# EAGLE board PCB_v78 (EAGLE 9.7.0)
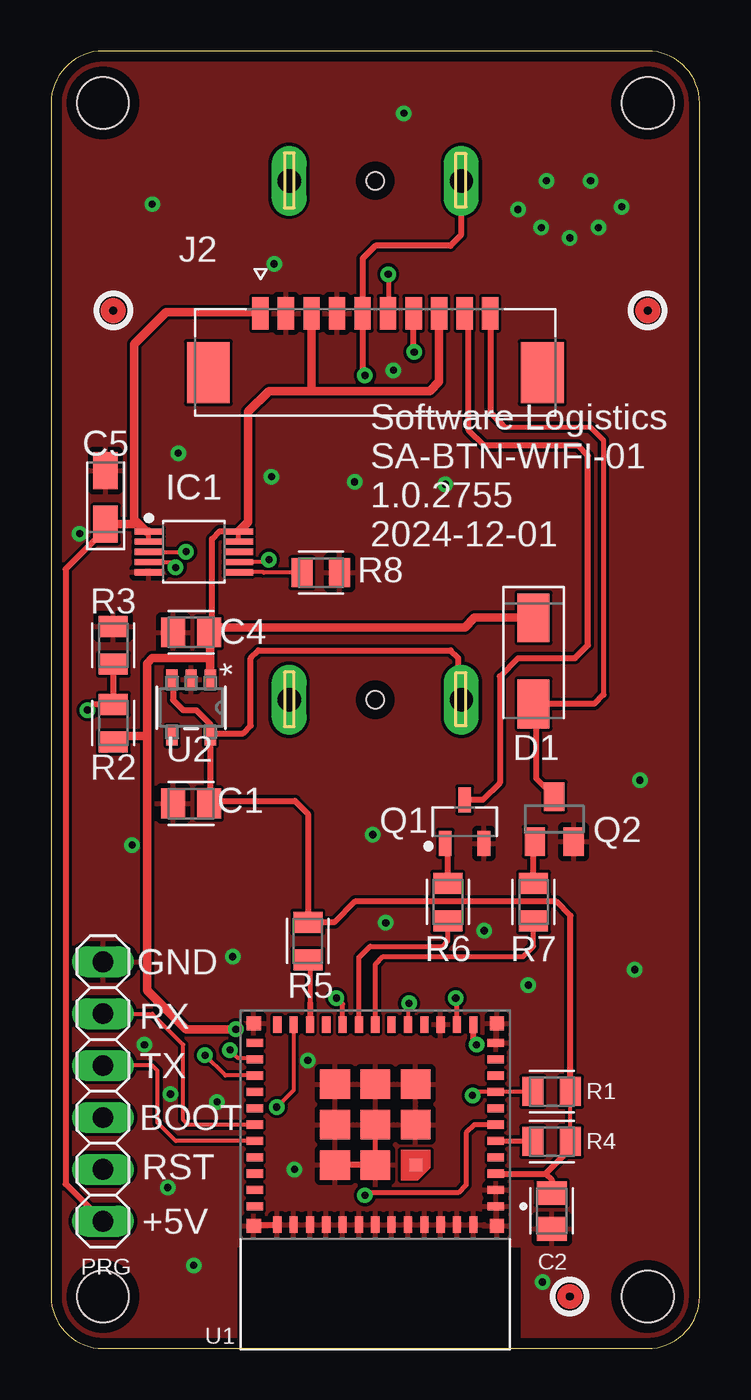
[diagram p0: board, top side]
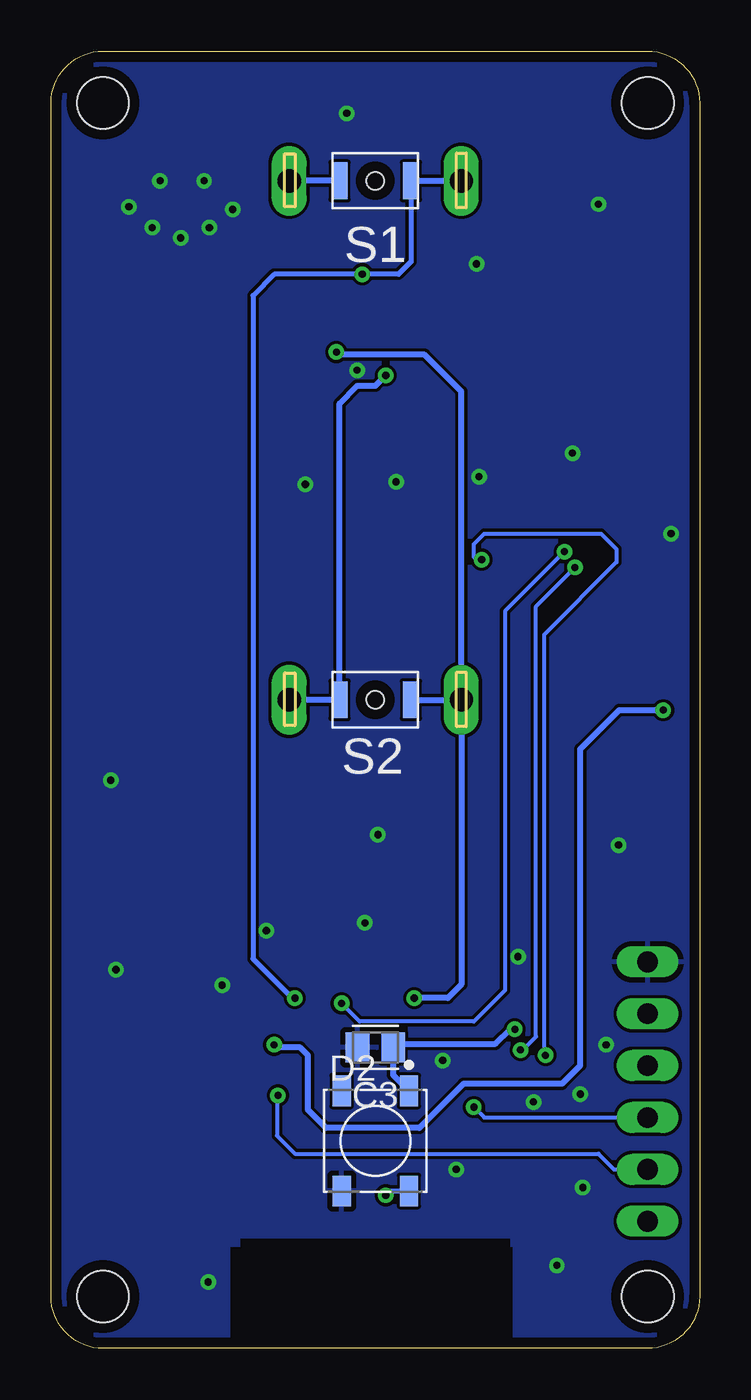
[diagram p1: board, bottom side, seen from below]

Size 31.75 x 63.5 mm. Coordinates in mm from the lower left corner, seen from the top.
Outline: 0,60.96 0,2.54 arc90 2.54,0 29.21,0 arc90 31.75,2.54 31.75,60.96 arc90 29.21,63.5 2.54,63.5 arc90 0,60.96
Copper layers (1*16): Top 0.035mm / dielectric 1.5mm / Bottom 0.035mm
Design rules "Fusion Electronics Design Rules": minimum track width 6mil, minimum drill 0.35mm, track to track 6mil, track to pad 6mil, pad to pad 6mil, via to via 6mil, smd to smd 6mil, copper to edge 20mil, drill to drill 4mil, minimum pad ring 10mil, minimum via ring 8mil, stop-mask expansion 4mil, vias tented up to drill 0mil, thermal gap 10mil
Holes 2.54 mm at 29.21,60.96 2.54,60.96 2.54,2.54 29.21,2.54

## Footprints (pad centres in the part's own frame; a part is rotated, then mirrored left to right if it is on the bottom)
CAPC2012X110 = smd 1.165 x 1.465: 1 -0.875,0; 2 0.875,0
CAPMP3216X180N = smd 1.796 x 1.189: 1 -1.31,0; 2 1.31,0
DIOM5226X290N = smd 2.392 x 1.565: 1 -2.108,0; 2 2.108,0
WS2812B = smd 1.5 x 0.9: 1 -2.45,1.65; 2 -2.45,-1.65; 3 2.45,-1.65; 4 2.45,1.65
SOP50P490X110-10 = smd 1.4 x 0.3: 1 -2.2,1; 2 -2.2,0.5; 3 -2.2,0; 4 -2.2,-0.5; 5 -2.2,-1; 6 2.2,-1; 7 2.2,-0.5; 8 2.2,0; 9 2.2,0.5; 10 2.2,1
MOLEX_532611071 = smd 0.8 x 1.6: 1 -5.625,2.4; 2 -4.375,2.4; 3 -3.125,2.4; 4 -1.875,2.4; 5 -0.625,2.4; 6 0.625,2.4; 7 1.875,2.4; 8 3.125,2.4; 9 4.375,2.4; 10 5.625,2.4 | smd 2.1 x 3: S1 -8.175,-0.5; S2 8.175,-0.5
1X06 = drill 1.016 long: 1 -6.35,0; 2 -3.81,0; 3 -1.27,0; 4 1.27,0; 5 3.81,0; 6 6.35,0
SOT95P237X112-3N = smd 1.224 x 0.625: 1 -1.064,0.95; 2 -1.064,-0.95; 3 1.064,0
SOT23 = smd 1 x 1.4: 1 -0.95,-1.1; 2 0.95,-1.1; 3 0,1.1
RESC2012X65 = smd 1.031 x 1.42: 1 -0.919,0; 2 0.919,0
B3U-1000P(M)-B = smd 0.8 x 1.8: 1 -1.75,0; 2 1.75,0 | hole 0.85: 0,0
XCVR_ESP32-C3-MINI-1-N4 = smd 0.8 x 0.4: 1 -5.9,1.3; 2 -5.9,0.5; 3 -5.9,-0.3; 4 -5.9,-1.1; 5 -5.9,-1.9; 6 -5.9,-2.7; 7 -5.9,-3.5; 8 -5.9,-4.3; 9 -5.9,-5.1; 10 -5.9,-5.9; 11 -5.9,-6.7; 25 5.9,-6.7; 26 5.9,-5.9; 27 5.9,-5.1; 28 5.9,-4.3; 29 5.9,-3.5; 30 5.9,-2.7; 31 5.9,-1.9; 32 5.9,-1.1; 33 5.9,-0.3; 34 5.9,0.5; 35 5.9,1.3 | smd 0.4 x 0.8: 12 -4.8,-7.6; 13 -4,-7.6; 14 -3.2,-7.6; 15 -2.4,-7.6; 16 -1.6,-7.6; 17 -0.8,-7.6; 18 0,-7.6; 19 0.8,-7.6; 20 1.6,-7.6; 21 2.4,-7.6; 22 3.2,-7.6; 23 4,-7.6; 24 4.8,-7.6; 36 4.8,2.2; 37 4,2.2; 38 3.2,2.2; 39 2.4,2.2; 40 1.6,2.2; 41 0.8,2.2; 42 0,2.2; 43 -0.8,2.2; 44 -1.6,2.2; 45 -2.4,2.2; 46 -3.2,2.2; 47 -4,2.2; 48 -4.8,2.2 | smd 0.6 x 0.6: 49_1 -1.975,-0.725 | smd 1.45 x 1.45: 49_2 0,-0.725; 49_3 1.975,-0.725; 49_4 1.975,-2.7; 49_5 1.975,-4.675; 49_6 0,-4.675; 49_7 -1.975,-4.675; 49_8 -1.975,-2.7; 49_9 0,-2.7 | smd 0.7 x 0.7: 50 5.95,2.25; 51 5.95,-7.65; 52 -5.95,-7.65; 53 -5.95,2.25
TSOT-23-5_RIT = smd 0.953 x 0.559: 1 -1.378,0.94; 2 -1.378,0; 3 -1.378,-0.94; 4 1.378,-0.94; 5 1.378,0.94
2-POS-NO-SWITCH = drill 1.143 long: P$1 -4.216,0; P$2 4.216,0

## Placement (x,y rotation side)
C1  2.2UF  [CAPC2012X110]  6.86,26.67 180 top
C2  0.1  [CAPC2012X110]  24.51,6.73 270 top
C3  0.1  [CAPC2012X110]  15.88,14.73 180 bottom
C4  2.2UF  [CAPC2012X110]  6.86,35.05 180 top
C5  [CAPMP3216X180N]  2.67,41.66 90 top
D1  US1G-E3/61T  [DIOM5226X290N]  23.62,33.66 270 top
D2  WS2812B  [WS2812B]  15.88,10.16 270 bottom
F1  FIDUCIAL  [FIDUCIAL]  3.05,50.8 0 top
F2  FIDUCIAL  [FIDUCIAL]  29.21,50.8 0 top
F3  FIDUCIAL  [FIDUCIAL]  25.4,2.54 0 top
IC1  MCP73833-AMI/UN  [SOP50P490X110-10]  6.99,38.99 0 top
J2  JST-1.25-MALE  [MOLEX_532611071]  15.88,48.26 0 top
PRG  PINHD-1X06_1X06M  [1X06]  2.54,12.57 270 top
Q1  NPN  [SOT95P237X112-3N]  20.25,25.78 90 top
Q2  NMOSFET  [SOT23]  24.64,25.91 0 top
R1  10K  [RESC2012X65]  24.51,12.57 0 top
R2  10K  [RESC2012X65]  3.05,30.61 270 top
R3  10K  [RESC2012X65]  3.05,34.42 270 top
R4  10K  [RESC2012X65]  24.51,10.13 0 top
R5  10K  [RESC2012X65]  12.57,19.94 90 top
R6  100  [RESC2012X65]  19.43,21.84 270 top
R7  100  [RESC2012X65]  23.62,21.84 270 top
R8  10K  [RESC2012X65]  13.21,37.97 180 top
S1  B3U-1000P(M)-B  [B3U-1000P(M)-B]  15.88,57.15 180 bottom
S2  B3U-1000P(M)-B  [B3U-1000P(M)-B]  15.88,31.75 0 bottom
U1  ESP32-C3-MINI-1-N4  [XCVR_ESP32-C3-MINI-1-N4]  15.88,8.26 180 top
U2  RT9080-33GJ5TSOT-23-5_RIT  [TSOT-23-5_RIT]  6.86,31.37 270 top
U$1  PUSHBUTTON  [2-POS-NO-SWITCH]  15.88,57.15 0 top
U$2  PUSHBUTTON  [2-POS-NO-SWITCH]  15.88,31.75 0 top

## Library data of the parts
C1-C5 = Capacitor; CATEGORY: Capacitor
D1 = Diode; CATEGORY: Diode; DESCRIPTION: DIODE GEN PURP 400V 1A DO214AC; MANUFACTURER: Vishay Semiconductor Diodes Division; SUB-CATEGORY: Rectifier
D2 = LED; CATEGORY: LED; COLOR: RGB; DESCRIPTION: LED integrated light source; MANUFACTURER: Worldsemi; MPN: WS2812B; OPERATING_TEMP: -25 ℃ to +80℃(TJ); PART_STATUS: Active; SUB_CATEGORY: RGB
F1-F3 U$1 U$2 = MiscParts
IC1 = IC_Power-Management; CATEGORY: IC_Power-Management; COST: 0.97; DESCRIPTION: Charger IC Lithium Ion/Polymer 10-MSOP; DIGIKEY: https://www.digikey.com/en/products/detail/microchip-technology/MCP73833-AMI-UN/1223157?s=N4IgTCBcDaILIGEAKB2AzADjWgtAQTgEkB6AVQDkQBdAXyA; MANUFACTURER: Microchip Technology; MPN: MCP73833-AMI/UN; OPERATING_TEMP: -40°C to 125°C; PART_STATUS: Active; ROHS_COMPLIANT: COMPLIANT; SERIES: -; SUB-CATEGORY: Battery Charger
J2 = JST-1.25-MALE; COST: 0.65; DIGIKEY: https://www.digikey.com/en/products/detail/molex/0532611071/699102; MANUFACTURER: Molex; MAXIMUM_PACKAGE_HEIGHT: 3.4 mm; PARTREV: J; STANDARD: Manufacturer Recommendations
PRG = Tinkercad
Q1 = Transistor; CATEGORY: Transistor; SUB-CATEGORY: BJT; TYPE: NPN
Q2 = Transistor; CATEGORY: Transistor; SUB-CATEGORY: MOSFET; TYPE: N-Channel
R1-R8 = Tutorial - Fusion 360; CATEGORY: Resistor; SUB-CATEGORY: Fixed
S1 = Switch; CATEGORY: SWITCH; COST: 0.76; DESCRIPTION: Ultra-small Surface-mounting Tactile Switches with High Contact Reliability; DIGIKEY: https://www.digikey.com/en/products/detail/omron-electronics-inc-emc-div/B3U-1000P/1534338; MANUFACTURER: OMRON; OPERATING_TEMPERATURE: -25°C to +70°C at 60%RH max; PART_STATUS: ACTIVE; SERIES: B3U; TYPE: Tactile
S2 = Switch; CATEGORY: SWITCH; DESCRIPTION: Ultra-small Surface-mounting Tactile Switches with High Contact Reliability; MANUFACTURER: OMRON; OPERATING_TEMPERATURE: -25°C to +70°C at 60%RH max; PART_STATUS: ACTIVE; SERIES: B3U; TYPE: Tactile
U1 = ESP32-C3-MINI-1-N4; MANUFACTURER: Espressif Systems; MAXIMUM_PACKAGE_HEIGHT: 2.55mm; PARTREV: v1.0; STANDARD: Manufacturer Recommendations
U2 = RT9080-33GJ5; COPYRIGHT: Copyright (C) 2024 Ultra Librarian. All rights reserved.; MANUFACTURER_PART_NUMBER: RT9080-33GJ5; MFR_NAME: Richtek Technology; SLPART: icreglin33v600matsot235

## Nets
+3.3V: C1.1 C2.1 J2.5 R1.2 R4.2 R5.2 S1.2 S2.1 U1.3 U2.3 U2.5 U$1.P$2 U$2.P$2
+5V: C5.1 IC1.1 IC1.2 J2.1 PRG.6
BATT_LVL: R2.1 R3.2 U1.12
BOOT: PRG.4 U1.23
CHRG_PG: IC1.7 U1.27
CHRG_ST1: IC1.3 U1.16
CHRG_ST2: IC1.4 U1.26
EN: PRG.5 R1.1 U1.8
GND: C1.2 C2.2 C3.2 C4.2 C5.2 D2.3 IC1.5 J2.2 J2.4 PRG.1 Q1.2 Q2.2 R3.1 R8.1 U1.1 U1.2 U1.11 U1.14 U1.36 U1.37 U1.38 U1.39 U1.40 U1.41 U1.42 U1.43 U1.44 U1.45 U1.46 U1.47 U1.48 U1.49_1 U1.49_2 U1.49_3 U1.49_4 U1.49_5 U1.49_6 U1.49_7 U1.49_8 U1.49_9 U1.50 U1.51 U1.52 U1.53 U2.2
LED_DIN: D2.4 U1.6
LIPO_PROG: IC1.6 R8.2
N$3: Q2.1 R7.1
N$4: Q1.1 R6.1
PIEZO: R6.2 U1.19
PIEZO_OUT: J2.9 Q1.3
PRG_RX: PRG.2 U1.30
PRG_TX: PRG.3 U1.31
STRAPPING1: R4.1 U1.5
STRAPPING2: R5.1 U1.22
SW1: J2.6 S1.1 U1.13 U$1.P$1
SW2: J2.7 S2.2 U1.20 U$2.P$1
VBATT: C3.1 C4.1 D1.1 D2.1 IC1.9 IC1.10 J2.3 J2.8 R2.2 U2.1
VIBR: R7.2 U1.18
VIBR_MOTOR: D1.2 J2.10 Q2.3

## Tracks (layer width: path | path; a pad name or v marks a point on that pad's centre or on a via)
+3.3V  (via drill 0.35)
  Top 0.203: R4.2 R1.2
  Top 0.305: U2.5 7.8,26.73 | 7.8,26.73 C1.1 | 7.8,26.73 7.86,26.8 11.94,26.8 12.57,26.16 R5.2 13.87,20.86 14.89,21.87 24.74,21.87 25.43,21.18 R1.2 | U2.3 5.97,32.7 5.97,31.75 6.48,31.24 7.11,31.24 7.8,30.56 U2.5 | U2.5 7.91,30.1 9.4,30.1 9.78,30.48 9.78,33.78 10.16,34.16 19.56,34.16 19.94,33.78 19.94,31.9 U$2.P$2 | U1.3 24.21,8.55 | 24.21,8.55 24.51,8.26 C2.1 | R4.2 25.43,9.77 24.21,8.55 | U$1.P$2 20.07,57.25 20.07,54.48 19.56,53.98 15.88,53.98 15.25,53.35 J2.5 15.25,47.74 v15.37,47.62
  Bottom 0.305: S1.2 U$1.P$2 | v15.37,47.62 15.88,47.12 16.76,47.12 17.62,46.26 S2.1 U$2.P$2
+5V
  Top 0.254: IC1.2 IC1.1
  Top 0.305: PRG.6 0.71,8.05 0.71,38.14 2.92,40.35
  Top 0.406: 4.06,40.47 4.06,49.15 5.64,50.72 10.19,50.72 J2.1 | 4.06,40.47 4.06,40.35 2.92,40.35 C5.1 | 4.06,40.47 4.17,40.47 4.66,39.99 IC1.1
BATT_LVL  (via drill 0.35)
  Top 0.305: R3.2 R2.1 2.06,31.53 v1.78,31.24 | v20.83,14.86 20.68,15.01 U1.12
  Bottom 0.305: v1.78,31.24 3.94,31.24 5.84,29.34 5.84,13.84 6.73,12.95 11.56,12.95 13.72,10.79 18.29,10.79 19.18,11.68 19.18,14.35 19.56,14.73 20.57,14.73 20.7,14.86 v20.83,14.86
BOOT  (via drill 0.35)
  Top 0.203: U1.23 11.88,12.64 v11.05,11.81
  Bottom 0.203: v11.05,11.81 10.54,11.3 PRG.4
CHRG_PG  (via drill 0.35)
  Top 0.203: v10.67,38.61 10.55,38.49 IC1.7 | U1.27 8.54,13.36 v7.54,14.35
  Bottom 0.203: v10.67,38.61 10.79,38.48 11.05,38.73 11.05,39.37 10.54,39.88 4.83,39.88 4.06,39.12 4.06,38.48 7.62,34.92 7.62,14.43 v7.54,14.35
CHRG_ST1  (via drill 0.35)
  Top 0.203: IC1.3 6.6,38.99 v6.61,39 | v17.53,16.89 17.48,16.84 U1.16
  Bottom 0.203: v17.53,16.89 16.64,16 11.05,16 9.52,17.53 9.52,36.09 v6.61,39
CHRG_ST2  (via drill 0.35)
  Top 0.203: U1.26 9.91,14.22 9.14,14.22 v8.76,14.61 | IC1.4 5.83,38.49 v6.1,38.23
  Bottom 0.203: v6.1,38.23 8,36.32 8,15.26 8.66,14.61 v8.76,14.61
EN  (via drill 0.35)
  Top 0.203: v20.64,12.38 20.83,12.57 21.76,12.57 U1.8 23.57,12.55 R1.1
  Bottom 0.203: PRG.5 4.19,8.76 4.95,9.53 19.81,9.53 20.69,10.41 20.69,12.33 v20.64,12.38
GND  (via drill 0.35)
  Top 0.254: U1.49_2 15.88,9.02 U1.49_9
  Top 0.305: U1.49_3 13.94,9.02 15.88,9.02 | U1.50 9.97,6.05 U1.36
  other vias: 11.92,8.76 6.22,43.81 10.79,42.67 14.86,42.42 19.3,42.29 10.92,53.09 16.76,47.88 1.39,39.88 15.75,25.15 16.38,20.83 21.21,20.45 23.37,17.78 6.99,4.06 5.71,7.87 28.57,18.54 28.83,27.81 8.89,19.18 5.84,12.45 4.57,14.86 17.27,60.45 4.95,56.01 24.26,57.15 26.42,57.15 22.86,55.75 24,54.86 25.4,54.36 26.8,54.86 27.94,55.88 24.06,3.25 3.97,24.64 12.57,14.1 8.13,12.06
  pour Top: 9.1,5.02 9.13,5.03 23,5.03 23.03,5.02 23.05,5 23.06,4.97 23.06,0.08 31.93,0.08 31.93,63.8 0.08,63.8 0.08,0.08 9.07,0.08 9.07,4.97 9.08,5
  pour Bottom: 9.07,5.06 9.12,5.08 23.01,5.08 23.06,5.06 23.09,5.02 23.11,4.98 23.11,0.13 32.38,0.13 32.38,64.01 0.13,64.01 0.13,0.13 8.96,0.13 9.02,0.18 9.02,4.98 9.04,5.02
LED_DIN  (via drill 0.35)
  Top 0.254: U1.6 20.73,10.96 20.32,10.54 20.32,8 19.94,7.62 15.37,7.62 v15.37,7.49
  Bottom 0.254: v15.37,7.49 15.15,7.71 D2.4
LIPO_PROG
  Top 0.203: IC1.6 10.39,37.99 10.41,37.98 11.91,37.98 R8.2
N$3
  Top 0.305: R7.1 23.62,24.74 Q2.1
N$4
  Top 0.305: R6.1 19.43,24.59 Q1.1
PIEZO
  Top 0.254: U1.19 15.07,19.14 15.62,19.68 19.18,19.68 19.43,19.94 R6.2
PIEZO_OUT
  Top 0.305: Q1.3 21.13,26.84 21.97,27.69 21.97,32.89 22.86,33.78 25.65,33.78 26.29,34.42 26.29,43.69 25.78,44.2 21.21,44.2 20.45,44.96 20.45,50.46 J2.9
PRG_RX
  Top 0.203: PRG.2 4.95,16.38 6.47,14.86 6.47,11.18 6.7,10.96 U1.30
PRG_TX
  Top 0.203: U1.31 6.1,10.15 5.21,11.05 5.21,13.59 4.95,13.84 PRG.3
STRAPPING1
  Top 0.254: U1.5 23.56,10.15 R4.1
STRAPPING2
  Top 0.254: 12.7,16.89 12.7,18.89 R5.1
  Top 0.305: 12.7,16.89 12.7,15.88 U1.22
SW1  (via drill 0.35)
  Top 0.254: U1.13 19.88,17.08 v19.81,17.14 | v16.51,52.58 J2.6
  Bottom 0.254: S1.1 14.12,53.19 14.73,52.58 v16.51,52.58 20.83,52.58 21.87,51.54 21.87,19.07 19.94,17.14 v19.81,17.14
  Bottom 0.305: S1.1 U$1.P$1
SW2  (via drill 0.35)
  Top 0.254: U1.20 14.28,16.84 v13.97,17.14
  Top 0.305: v17.78,48.77 17.75,48.8 J2.7
  Bottom 0.305: U$2.P$1 11.66,17.8 12.32,17.14 v13.97,17.14 | U$2.P$1 11.66,46.84 13.46,48.64 17.78,48.64 v17.78,48.77 | S2.2 U$2.P$1
VBATT  (via drill 0.35)
  Top 0.254: IC1.9 9.19,39.88 IC1.10 9.19,40.01
  Top 0.305: C4.1 7.87,35.19 7.87,39.62 8.26,40.01 9.19,40.01 | 2.92,29.56 R2.2
  Top 0.406: D1.1 20.73,35.76 20.26,35.29 7.97,35.29 C4.1 7.8,34.99 7.8,33.66 | 7.8,33.66 U2.1 | J2.3 12.75,46.86 | 12.75,46.86 10.67,46.86 9.65,45.85 9.65,40.46 IC1.10 | R2.2 3.33,29.97 4.7,29.97 | 7.8,33.66 7.67,33.78 4.95,33.78 4.7,33.53 4.7,29.97 | J2.8 19,47.32 18.54,46.86 12.75,46.86 | 4.7,29.97 4.7,17.53 6.6,15.62 v9.04,15.62
  Bottom 0.305: D2.1 15,13.38 C3.1 14.82,14.91 9.98,14.91 9.27,15.62 v9.04,15.62
VIBR
  Top 0.254: R7.2 23.62,19.68 23.11,19.18 16.26,19.18 15.88,18.8 U1.18
VIBR_MOTOR
  Top 0.254: 22.1,45.21 22.23,45.09 26.42,45.09 27.05,44.45 27.05,32
  Top 0.305: Q2.3 23.75,27.9 23.75,31.42 D1.2 26.59,31.55 27.05,32 | J2.10 21.5,45.81 22.1,45.21

## Text on the board
tPlace: Software Logistics / SA-BTN-WIFI-01 / 1.0.2755 / 2024-12-01 | GND | RX | TX | BOOT | RST | +5V